# Altium PCB Sensor_Box_IO_Relay.PCBDOC (part 1 of 2)
Units mm, origin at the board's own origin, x right, y up, seen from the top; angles counter-clockwise.
Board outline 45.25 x 73.05 mm, 2 copper layers (Top, Bot), stack 1.571 mm thick; 73 components, 71 nets, 243 pads, 88 vias.
Unrouted connection lines stored in the file: 1.
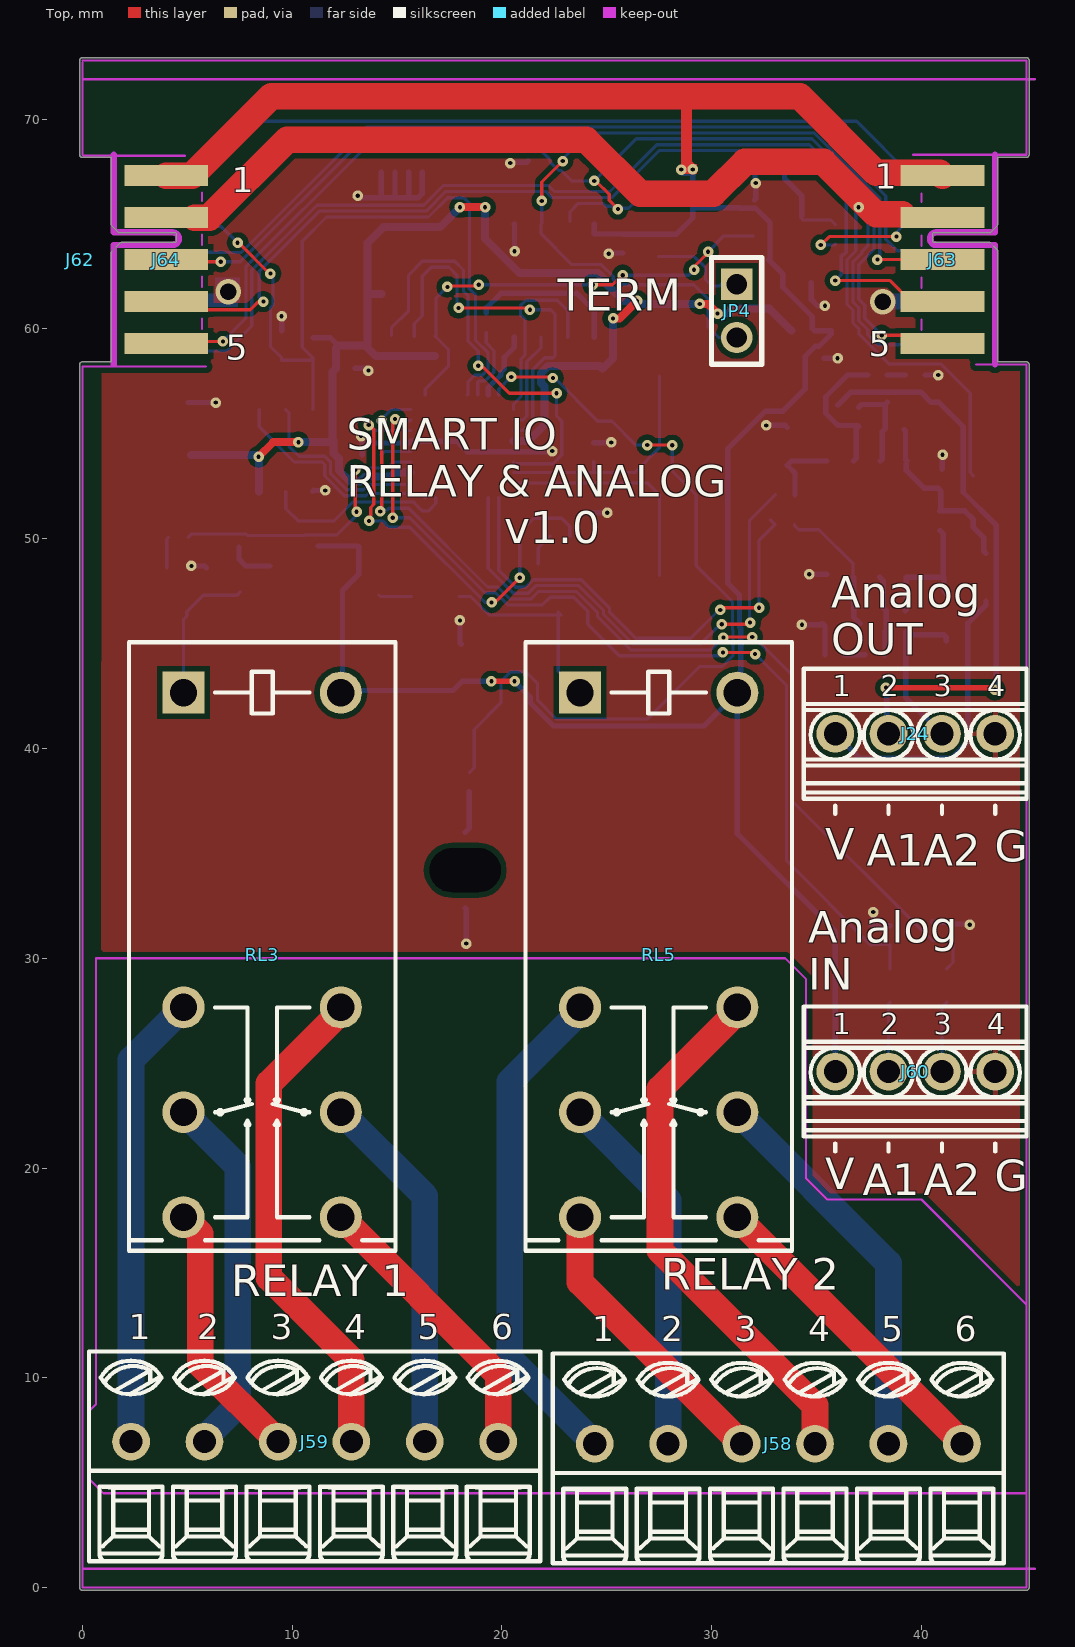
[diagram p0: Top view]
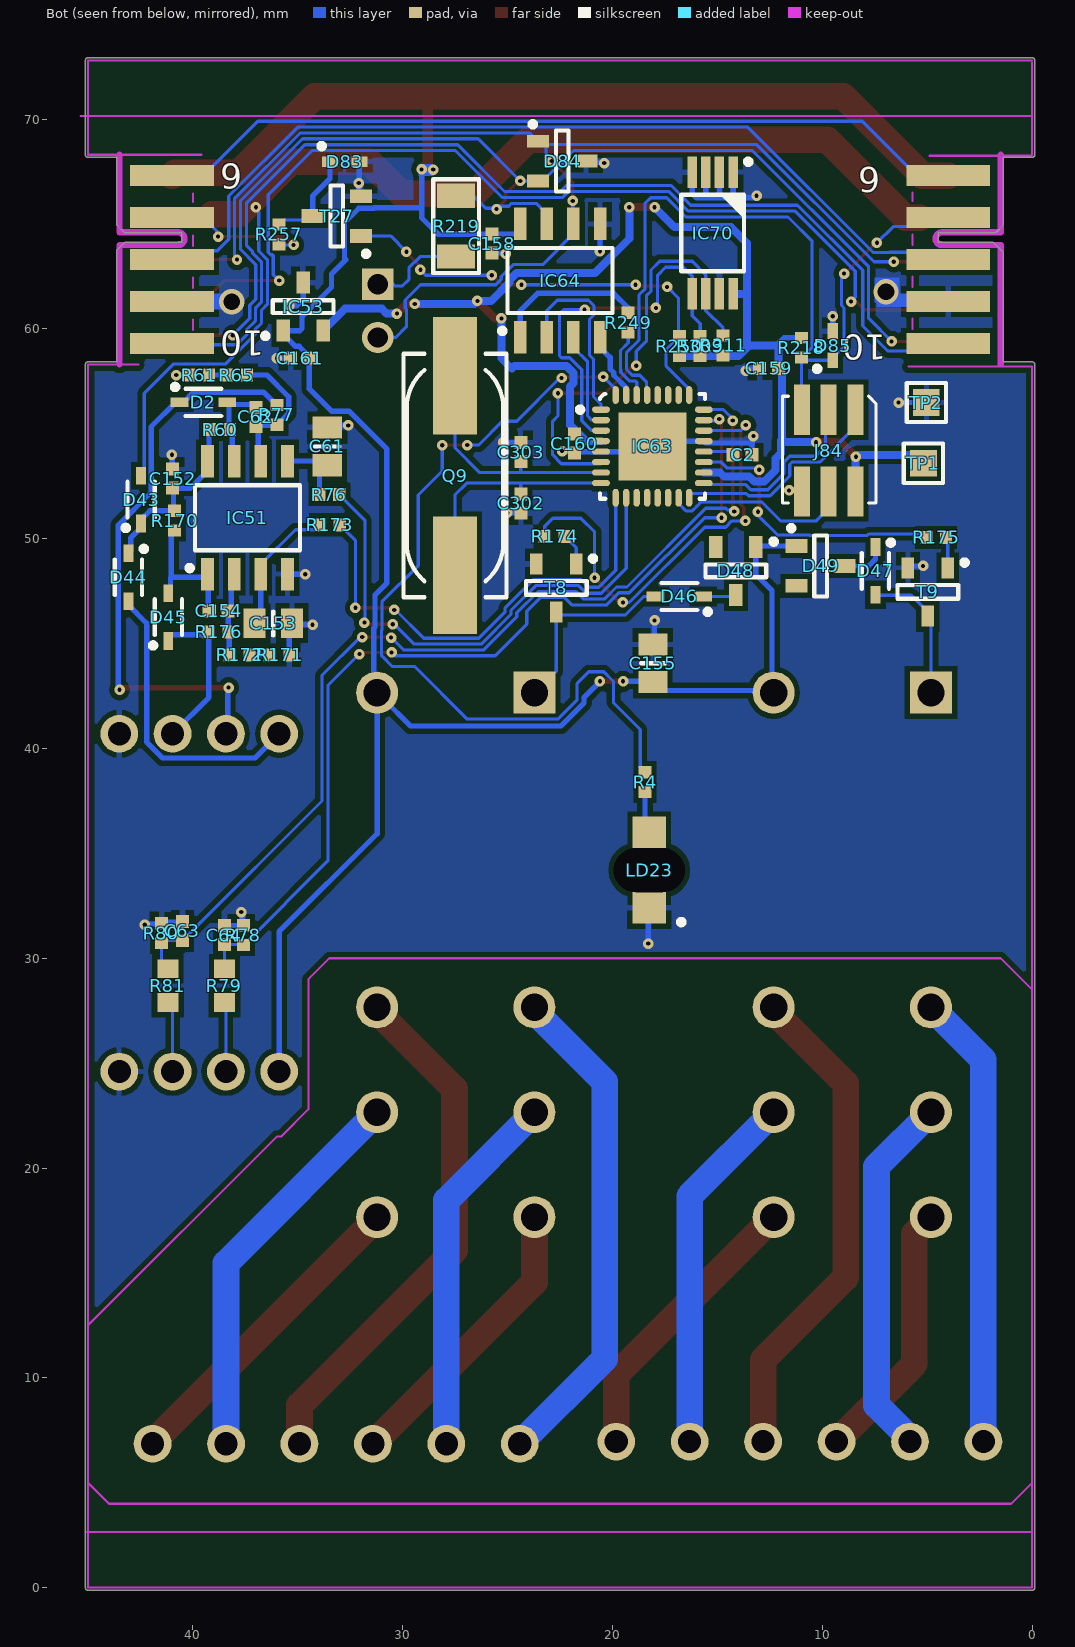
[diagram p1: Bot view, seen from below]
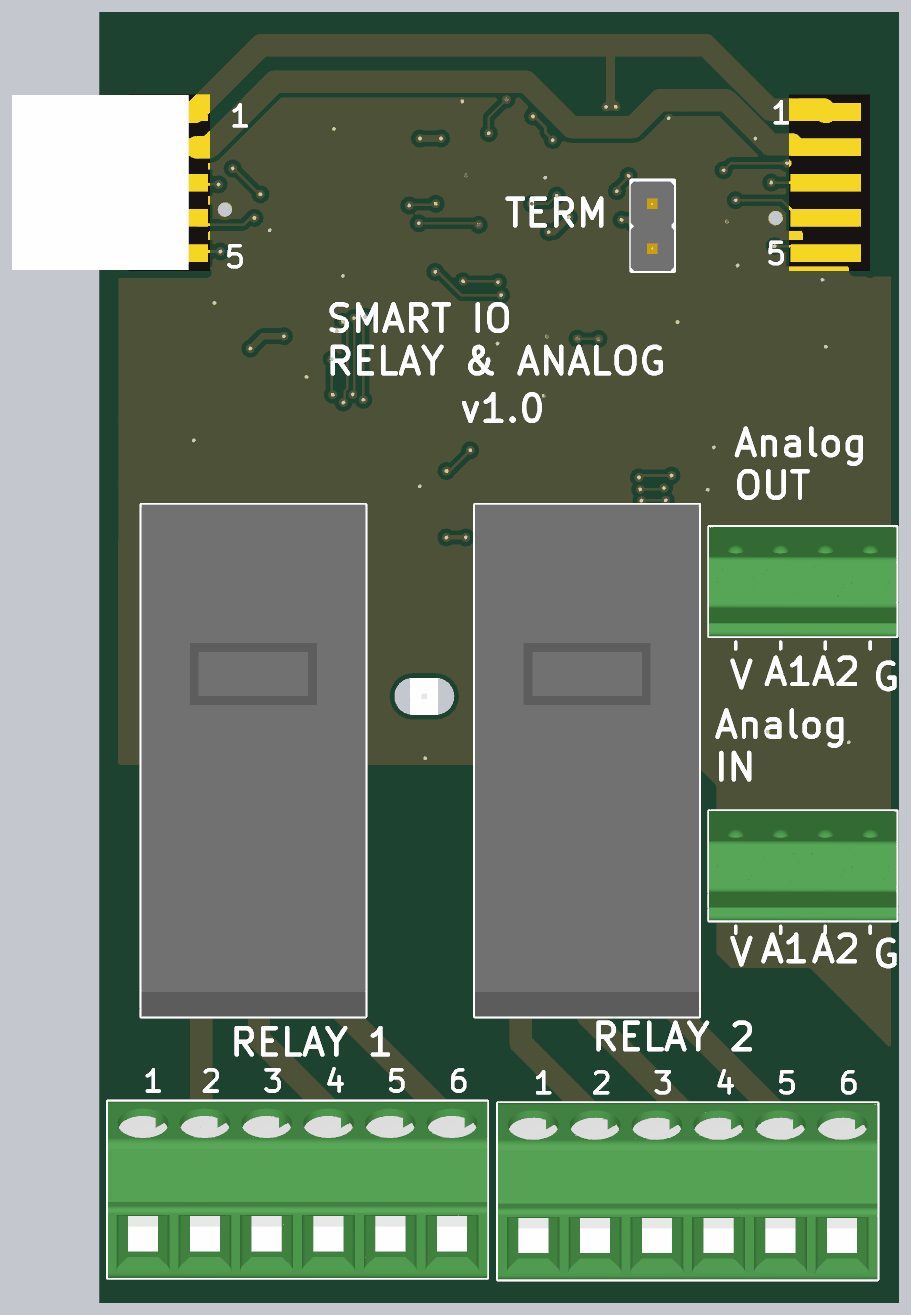
[diagram p2: 3D render of the assembled board from above, using the file's embedded part models]
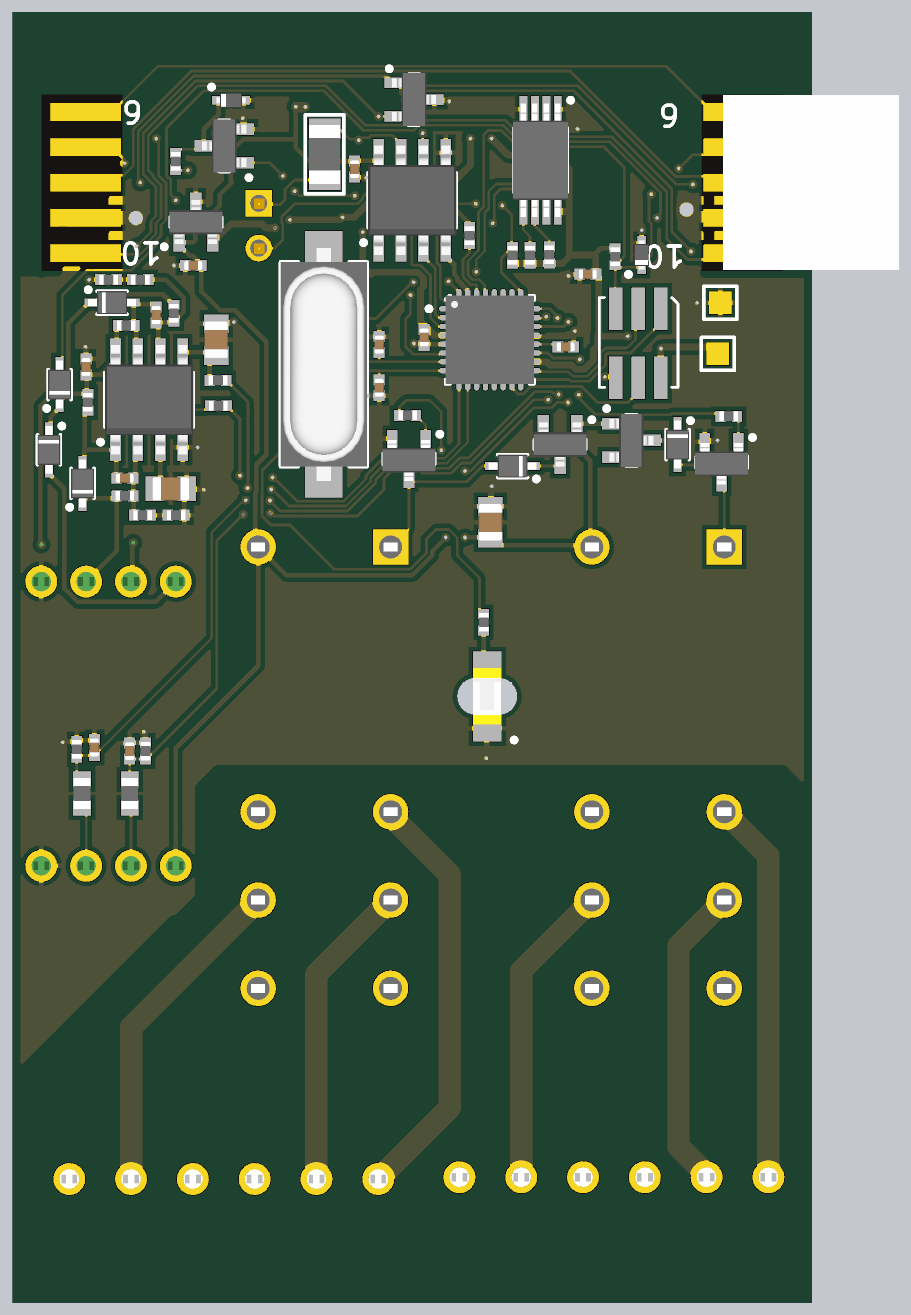
[diagram p3: 3D render of the assembled board from below, using the file's embedded part models]

## Layer stack, top to bottom
TopSolder: solder mask 0.0102, Solder Resist, Dk 3.5
Top: signal copper 0.0356
Dielectric1: core 1.5, FR-4, Dk 4.8
Bot: signal copper 0.0356
BottomSolder: solder mask 0.0102, Solder Resist, Dk 3.5

## Board outline
-0.127,58.3 cw(c0,58.3) 0,58.427 1.373,58.427 1.373,63.6 cw(c1.5,63.6) 1.41,63.69 1.81,64.09 1.809,64.09 cw(c1.9,64) 1.9,64.127 4.473,64.127 4.473,64.573 1.8,64.573 cw(c1.8,64.7) 1.709,64.61 1.71,64.61 1.41,64.91 1.41,64.909 cw(c1.5,65) 1.373,65 1.373,68.173 0,68.173 cw(c0,68.3) -0.127,68.3 -0.127,72.8 cw(c0,72.8) 0.002,72.927 45,72.927 cw(c45,72.8) 45.127,72.8 cw(c45,72.8) 45.127,72.798 45.127,68.3 cw(c45,68.3) 45,68.173 43.627,68.173 43.627,65 cw(c43.5,65) 43.59,64.909 43.59,64.91 43.29,64.61 43.291,64.61 cw(c43.2,64.7) 43.2,64.573 40.527,64.573 40.527,64.127 43.2,64.127 cw(c43.2,64) 43.291,64.09 43.29,64.09 43.59,63.79 cw(c43.5,63.7) 43.627,63.7 43.627,58.427 45,58.427 cw(c45,58.3) 45.09,58.39 cw(c45,58.3) 45.127,58.3 45.127,0 cw(c45,0) 45.096,-0.084 cw(c45,0) 45,-0.127 22.5,-0.127 cw(c22.5,0) 22.498,-0.127 0.001,-0.127 cw(c0,0) -0.127,0

## Design rules (kind name [scope] priority, off if disabled: settings)
Clearance Clearance_DIFF [(InDifferentialPairClass('All Differential Pairs'))] p1: gap=0.127 ignorepadtopadclearanceinfootprint=FALSE except(0: Arc-Hole Track-Hole SMDPad-Hole THPad-Hole Via-Hole Fill-Hole Poly-Hole Region-Hole Text-Hole; 0.254: Arc-Poly Track-Poly SMDPad-Poly THPad-Poly Via-Poly Fill-Poly Poly-Poly Poly-Region Poly-Text)
Clearance [All] p2: gap=0.127 ignorepadtopadclearanceinfootprint=FALSE except(0: Arc-Hole Track-Hole SMDPad-Hole THPad-Hole Via-Hole Fill-Hole Poly-Hole Region-Hole Text-Hole; 0.254: Arc-Poly Track-Poly SMDPad-Poly THPad-Poly Via-Poly Fill-Poly Poly-Poly)
DiffPairsRouting [All] p1: maxlimit=0.254 minlimit=0.127 mostfreqgap=0.127 toplayer_minwidth=0.127 toplayer_maxwidth=0.381 toplayer_prefwidth=0.254 bottomlayer_minwidth=0.127 bottomlayer_maxwidth=0.381 bottomlayer_prefwidth=0.254 maxuncoupledlength=12.7
FabricationTestPointUsage TestPointUsage [All] p1: valid=0 allowmultiple=FALSE
FabricationTestpoint Testpoint [All] p1: side=3 testpointundercomponent=TRUE minsize=1.016 maxsize=2.54 preferedsize=1.524 minholesize=0.508 maxholesize=1.016 preferedholesize=0.813 testpointgrid=0.025 allowsidetop=TRUE allowsidebottom=TRUE usegrid=TRUE gridtolerance=0
HoleSize [All] p1: absolutevalues=TRUE maxlimit=3.81 minlimit=0.025 maxpercent=80.000 minpercent=20.000
HoleToHoleClearance [All] p1: gap=0.025 allowstackedmicrovias=TRUE
MinimumSolderMaskSliver [All] p1: minsoldermaskwidth=0
PlaneClearance [All] p1: clearance=0.254
PlaneConnect [All] p1: planeconnectstyle=Direct reliefexpansion=0.508 reliefentries=4 reliefconductorwidth=0.254 reliefairgap=0.254
PolygonConnect PolygonConnect_pad [(InPadClass('All Pads'))] p1: connectstyle=Relief reliefconductorwidth=0.254 reliefentries=4 polygonreliefangle="90 Angle" airgapwidth=0.254
PolygonConnect [All] p2: connectstyle=Direct reliefconductorwidth=0.254 reliefentries=4 polygonreliefangle="45 Angle" airgapwidth=0.254
RoomDefinition Sensor_Box_IO_Relay [InComponentClass('Sensor_Box_IO_Relay')] p1 off: confinementstyle=ConfineIn formatcopy=TRUE lockcomponents=FALSE outline -10.578,28.41 172.172,28.41 172.172,52.16 -10.578,52.16
RoutingVias [All] p1: holewidth=0.2 width=0.5 viastyle="Through Hole" minholewidth=0.2 minwidth=0.5 maxholewidth=1 maxwidth=2
SilkToSilkClearance [All] p1: silktosilkclearance=0
SilkToSolderMaskClearance SilkscreenOverComponentPads [IsPad] p1: minsilkscreentomaskgap=0 clearancetoexposedcopper=TRUE
SolderMaskExpansion [All] p1: expansion=0.051
Width [All] p1: maxlimit=1.27 minlimit=0.127 preferedwidth=0.127
20 further rules are at their usual default settings.

## Components (designator, comment, footprint, x,y, rotation, side; value= is the part's Value field where it differs from the comment)
C2 "1uF" CAPC1005X55N 13.8,54 r180 bottom
C61 "10uF" CAPC2012X135N 33.6,54.4 r90 bottom
C62 "18pF" CAPC1005X55N 37,55.8 r270 bottom
C63 "100nF" CAPC1005X55N 40.5,31.3 r90 bottom
C64 "100nF" CAPC1005X55N 38.5,31.1 r90 bottom
C152 "1uF" CAPC1005X55N 40.973,52.861 r270 bottom
C153 "10uF" CAPC2012X135N 36.173,45.961 r180 bottom
C154 "18pF" CAPC1005X55N 38.773,46.561 r180 bottom
C155 "10uF" CAPC2012X135N 18.073,44.061 r90 bottom
C158 "1uF" CAPC1005X55N 25.756,64.067 r90 bottom
C159 "1uF" CAPC1005X55N 12.548,58.115 r180 bottom
C160 "100nF" CAPC1005X55N 21.819,54.534 r90 bottom
C161 "100nF" CAPC1005X55N 34.9,58.6 r0 bottom
C302 "18pF" CAPC1005X55N 24.373,51.681 r90 bottom
C303 "18pF" CAPC1005X55N 24.373,54.127 r270 bottom
D2 "1N4148WS" SODFL2512X100N 39.5,56.5 r180 bottom
D43 "1N4148WS" SODFL2512X100N 42.473,51.861 r90 bottom
D44 "1N4148WS" SODFL2512X100N 43.073,48.161 r270 bottom
D45 "1N4148WS" SODFL2512X100N 41.173,46.261 r90 bottom
D46 "1N4148WS" SODFL2512X100N 16.815,47.244 r0 bottom
D47 "1N4148WS" SODFL2512X100N 7.468,48.463 r270 bottom
D48 "BZX84C15" SOT95P240X130-3N 14.122,48.463 r270 bottom
D49 "BZX84C15" SOT95P240X130-3N 10.084,48.7 r180 bottom
D83 "PESD3V3S1UB" SODFL1608X65N 32.766,67.962 r180 bottom
D84 "SM712" SOT95P237X112-3N 22.4,68 r180 bottom
D85 "PESD3V3S1UB" SODFL1608X65N 9.5,59.2 r90 bottom
IC51 "LM358AD" SOIC127P600X175-8N 37.4,51 r90 bottom
IC53 "AP7313-33SAG-7" SOT95P240X130-3N 34.747,61.062 r90 bottom
IC63 "ATMEGA328PB-MU" QFN50P500X500X100-33N-S325 18.1,54.4 r180 bottom
IC64 "ST485ECDR" SOIC127P600X175-8N 22.5,62.3 r90 bottom
IC70 "M24256-BRDW6" SOP65P640X120-8N 15.229,64.567 r270 bottom
J24 "=Family" PHOENIX_1725672 39.7,40.7 r0 top
J58 "=Family" PHOENIX_1751138 33.173,6.861 r0 top
J59 "=Family" PHOENIX_1751138 11.073,6.961 r0 top
J60 "=Family" PHOENIX_1725672 39.7,24.6 r0 top
J62 "=Family" "AVX_00 9159 010 061 916" -0.1,63.3 r180 top
J63 "=Family" EDGE10T5B10_P200W1000L0F100X400 41,59.3 r90 top
J64 "=Family" EDGE10T1B6_P200W1000L0F100X400 4,67.3 r270 top
J84 "ZL322-2X3P or PLHTD6S-TR-CV" ZL322-2X3P 9.7,54.2 r0 bottom
JP4 "1798942 (goldpin 2x 2.54)" jump 31.191,62.128 r0 top
LD23 "Green" LED_KINGBRIGHT_KPTR3216 18.25,34.2 r270 bottom
Q9 "8.192MHz" XTAL_ABRACON_ABLS 27.508,53.01 r90 bottom
R4 "10k" RESC1005X40N 18.45,38.4 r270 bottom
R60 "10k" RESC1005X40N 38.7,55.2 r180 bottom
R61 "10k" RESC1005X40N 39.7,57.8 r0 bottom
R65 "10k" RESC1005X40N 37.9,57.8 r0 bottom
R76 "10k" RESC1005X40N 33.5,52.1 r180 bottom
R77 "10k" RESC1005X40N 36,55.9 r270 bottom
R78 "1k" RESC1005X40N 37.6,31.1 r270 bottom
R79 "9k1" RESC1608X55N 38.5,28.7 r270 bottom
R80 "1k" RESC1005X40N 41.5,31.2 r270 bottom
R81 "9k1" RESC1608X55N 41.2,28.7 r270 bottom
R170 "10k" RESC1005X40N 40.873,50.861 r270 bottom
R171 "10k" RESC1005X40N 35.873,44.461 r180 bottom
R172 "10k" RESC1005X40N 37.773,44.461 r180 bottom
R173 "10k" RESC1005X40N 33.473,50.661 r180 bottom
R174 "1k" RESC1005X40N 22.758,50.114 r180 bottom
R175 "1k" RESC1005X40N 4.573,50.061 r180 bottom
R176 "10k" RESC1005X40N 38.773,45.561 r180 bottom
R218 "10k" RESC1005X40N 11,59.1 r270 bottom
R219 "120R" 1206R 27.457,64.897 r270 bottom
R249 "1k" RESC1005X40N 19.253,60.298 r90 bottom
R250 "100k" RESC1005X40N 16.815,59.182 r270 bottom
R257 "49R9" RESC1005X40N 35.9,64.5 r90 bottom
R309 "10k" RESC1005X40N 15.824,59.182 r90 bottom
R311 "10k" RESC1005X40N 14.732,59.207 r90 bottom
RL3 "5VDC" REL_OMRON_G2RL-2-5DC 8.573,30.561 r270 top
RL5 "5VDC" REL_OMRON_G2RL-2-5DC 27.473,30.561 r270 top
T8 "BC817-25" SOT95P230X110-3N 22.682,47.65 r270 bottom
T9 "BC817-25" SOT95P230X110-3N 4.973,47.461 r270 bottom
T27 "BSS138LT1G" SOT95P240X110-3N 33.147,65.38 r0 bottom
TP1 "Test Point" TPS127 5.182,53.594 r90 bottom
TP2 "Test Point" TPS127 5.043,56.49 r90 bottom

## Footprints (in the part's own frame and the unit in brackets; to place one, negate y for a bottom-side part, rotate by r counter-clockwise, add the part's x,y. Pads: shape width x height; smd on the part's side, far side on the other; paste and mask are expansions set on the pad)
1206R [mm]
  rect 1.15x1.8 smd: 1(-1.45,0) 2(1.45,0)
  silkscreen extent -2.24,-1.09 2.24,1.09, body extent -1.67,-0.87 1.68,0.88, height 0.65
"AVX_00 9159 010 061 916" [mm] "10 Contacts, 2mm Pitch, Open Ended Card Edge Connector, 9159 Series"
  body extent -5,-4.95 5,4.95, height 1.7
CAPC1005X55N [mm] "Chip Capacitor, Body 1.0x0.55mm, IPC Medium Density"
  rect 0.62x0.62 smd: 1(-0.45,0) 2(0.45,0)
  body extent -0.52,-0.27 0.53,0.28, height 0.55
CAPC2012X135N [mm] "Chip Capacitor, Body 2.0x1.25mm, IPC Medium Density"
  rect 1.05x1.4 smd: 1(-0.9,0) 2(0.9,0)
  silkscreen extent 0,-0.58 0,0.58, body extent -1.05,-0.67 1.05,0.68, height 1.25
EDGE10T1B6_P200W1000L0F100X400 [mm] "10 contacts Board Edge Connector, First Left Top Pad 1, First Left Bottom Pad 2, Pitch 2mm, Length 0mm, Width 10mm, Finger Lenght 4mm, Finger Width 1mm"
  rect 1x4 smd paste-0.5: 1(0,0) 2(2,0) 3(4,0) 4(6,0) 5(8,0)
  rect 1x4 smd far side paste-0.5: 6(0,0) 7(2,0) 8(4,0) 9(6,0) 10(8,0)
  KeepOutLayer lines w0.3: 9,-2.5 3.3,-2.5 3.3,0.3 ccw(c3,0.3) 2.7,0.3 2.7,-2.5 -1,-2.5
EDGE10T5B10_P200W1000L0F100X400 [mm] "10 contacts Board Edge Connector, First Left Top Pad 5, First Left Bottom Pad 10, Pitch 2mm, Length 0mm, Width 10mm, Finger Lenght 4mm, Finger Width 1mm"
  rect 1x4 smd paste-0.5: 1(8,0) 2(6,0) 3(4,0) 4(2,0) 5(0,0)
  rect 1x4 smd far side paste-0.5: 6(8,0) 7(6,0) 8(4,0) 9(2,0) 10(0,0)
  KeepOutLayer lines w0.3: -1,-2.5 4.7,-2.5 4.7,0.3 cw(c5,0.3) 5.3,0.3 5.3,-2.5 9,-2.5
jump [mm]
  rect 1.5x1.5 hole 0.965: 1(0,0)
  round 1.5 hole 0.965: 2(0,-2.54)
  silkscreen extent -1.2,-3.81 1.2,1.27, body extent -1.26,-3.84 1.19,1.24, height 8
LED_KINGBRIGHT_KPTR3216 [mm] "Reverse Mount LED 3216, Hole 2.1x2.3mm 0.35mm Height"
  rect 1.5x1.6 smd: 1(1.8,0) 2(-1.8,0)
  oval 1.9x3.2 hole 2.1 slot 3.4 at 90 deg unplated mask+0.1: 3(0,0)
  silkscreen extent 2.35,1.4 2.6,1.65, body extent -1.6,-0.8 1.6,0.8, height 0.25
PHOENIX_1725672 [mm] "Micro PCB Terminal Block, Pitch 2.54mm, 4 Positions, Screw Connection"
  round 1.8 hole 1.1: 1(-3.81,0) 2(-1.27,0) 3(1.27,0) 4(3.81,0)
  silkscreen extent -5.31,-3.81 5.31,3.1, body extent -5.31,-3.1 5.31,3.1, height 8.5
PHOENIX_1751138 [mm] "PC Terminal Block, Pitch 3.5mm, 6 Positions, Screw Connection"
  round 1.8 hole 1.1: 1(-8.75,0) 2(-5.25,0) 3(-1.75,0) 4(1.75,0) 5(5.25,0) 6(8.75,0)
  silkscreen extent -10.75,-5.7 10.75,4.3, body extent -10.75,-5.7 10.75,4.3, height 9.5
QFN50P500X500X100-33N-S325 [mm] "QFN, (MO-220-VHHD-4) 0.50mm pitch,square; 8 pin X 8 pin, 5mm X 5mm X 1.00mm H body (w/thermal tab 3.25 X 3.25mm),  IPC Medium Density"
  oval 0.85x0.3 smd: 1(-2.45,1.75) 2(-2.45,1.25) 3(-2.45,0.75) 4(-2.45,0.25) 5(-2.45,-0.25) 6(-2.45,-0.75) 7(-2.45,-1.25) 8(-2.45,-1.75) 17(2.45,-1.75) 18(2.45,-1.25) 19(2.45,-0.75) 20(2.45,-0.25) 21(2.45,0.25) 22(2.45,0.75) 23(2.45,1.25) 24(2.45,1.75)
  oval 0.3x0.85 smd: 9(-1.75,-2.45) 10(-1.25,-2.45) 11(-0.75,-2.45) 12(-0.25,-2.45) 13(0.25,-2.45) 14(0.75,-2.45) 15(1.25,-2.45) 16(1.75,-2.45) 25(1.75,2.45) 26(1.25,2.45) 27(0.75,2.45) 28(0.25,2.45) 29(-0.25,2.45) 30(-0.75,2.45) 31(-1.25,2.45) 32(-1.75,2.45)
  rect 3.25x3.25 smd: 33(0,0)
  silkscreen extent -3.58,-2.5 2.5,2.5, body extent -2.5,-2.5 2.5,2.5, height 1
REL_OMRON_G2RL-2-5DC [mm] "8 Leads, Row Spacing 7.5 mm; Body 29mm x 12.7mm, OMRON_G2RL Series"
  rect 2x2 hole 1.3: 1(-12.1,-3.75)
  round 2 hole 1.3: 2(2.9,-3.75) 3(7.9,-3.75) 4(12.9,-3.75) 5(12.9,3.75) 6(7.9,3.75) 7(2.9,3.75) 8(-12.1,3.75)
  silkscreen extent -14.5,-6.35 14.5,6.35, body extent -14.5,-6.35 14.5,6.35, height 15.7
RESC1005X40N [mm] "Chip Resistor, EIA 0402, Metric 1005, Body 1.0x0.5mm, IPC Medium Density"
  rect 0.58x0.62 smd: 1(-0.47,0) 2(0.47,0)
  body extent -0.52,-0.27 0.53,0.28, height 0.4
RESC1608X55N [mm] "Chip Resistor, EIA 0603, Metric 1608, Body 1.6x0.8mm, IPC Medium Density"
  rect 0.9x1 smd: 1(-0.8,0) 2(0.8,0)
  body extent -0.87,-0.47 0.88,0.48, height 0.55
SODFL1608X65N [mm] "Ultra Small Outline Diode Flat Lead (SOD-523), Body; 1.2mm L X 0.8mm W X 0.65mm H, IPC Medium Density"
  rect 0.75x0.5 smd: 1(-0.7,0) 2(0.7,0)
  silkscreen extent -1.23,0.63 -0.98,0.87, body extent -0.82,-0.42 0.83,0.43, height 0.65
SODFL2512X100N [mm] "SODFL Diode; 1.70mm W X 1.25mm L X 1.00mm H body, IPC Medium Density"
  rect 0.84x0.46 smd: 1(-1.14,0) 2(1.14,0)
  silkscreen extent -1.48,-0.65 0.85,0.85, body extent -1.35,-0.65 1.35,0.65, height 1
SOIC127P600X175-8N [mm] "SOIC 8, Pitch 1.27mm - Body 4x5mm, IPC Medium Density"
  rect 1.55x0.6 smd: 1(-2.7,1.905) 2(-2.7,0.635) 3(-2.7,-0.635) 4(-2.7,-1.905) 5(2.7,-1.905) 6(2.7,-0.635) 7(2.7,0.635) 8(2.7,1.905)
  silkscreen extent -2.52,-2.5 1.55,2.88, body extent -3.1,-2.5 3.1,2.5, height 1.75
SOP65P640X120-8N [mm] "SOP, 0.65mm pitch; 8 pin, 4.40mm W X 3.00mm L X 1.20mm H body, IPC Medium Density"
  rect 1.5x0.45 smd: 1(-2.9,0.975) 2(-2.9,0.325) 3(-2.9,-0.325) 4(-2.9,-0.975) 5(2.9,-0.975) 6(2.9,-0.325) 7(2.9,0.325) 8(2.9,0.975)
  silkscreen extent -3.52,-1.5 1.83,1.82, body extent -3.2,-1.55 3.2,1.55, height 1.2
SOT95P230X110-3N [mm] "SOT23, 3 pin, Pitch 0.95mm - 1.3mm W X 2.9mm L X 1.1mm H, IPC Medium Density"
  rect 1x0.6 smd: 1(-1.15,0.95) 2(-1.15,-0.95) 3(1.15,0)
  silkscreen extent -1.52,-1.45 0.33,1.87, body extent -1.08,-1.5 1.25,1.5, height 1.1
SOT95P237X112-3N [mm] "SOT, 0.95mm, pitch; 3 pin,1.30mm W X 2.92mm L X 1.12mm H body, IPC Medium Density"
  rect 1.05x0.6 smd: 1(-1.15,0.95) 2(-1.15,-0.95) 3(1.15,0)
  silkscreen extent -1.53,-1.45 0.3,1.87, body extent -1.25,-1.5 1.25,1.5, height 1.1
SOT95P240X110-3N [mm] "SOT23 3-Leads, Pitch 0.95mm, Body 1.3x2.9mm, IPC Medium Density"
  rect 1.05x0.65 smd: 1(-1.15,0.95) 2(-1.15,-0.95) 3(1.15,0)
  silkscreen extent -1.52,-1.45 0.3,1.92, body extent -1.25,-1.5 1.25,1.5, height 1.1
SOT95P240X130-3N [mm] "SOT23 3-Leads, Pitch 0.95mm - Body 1.3x2.9mm, IPC Medium Density"
  rect 1.05x0.65 smd: 1(-1.15,0.95) 2(-1.15,-0.95) 3(1.15,0)
  silkscreen extent -1.52,-1.45 0.3,1.92, body extent -1.25,-1.5 1.25,1.5, height 1.3
TPS127 [mm] "1.27 x  1.27mm SMD Test Point Area"
  rect 1.27x1.27 smd paste-1.27: 1(0,0)
  silkscreen extent -0.94,-0.94 0.94,0.94
XTAL_ABRACON_ABLS [mm] "HC/49US (AT49) SMD Cristal, Body 11.4x4.7mm, ABLS Serie"
  rect 5.6x2.1 smd: 1(-4.75,0) 2(4.75,0)
  silkscreen extent -5.8,-2.45 5.8,2.45, body extent -6.6,-2.45 6.6,2.45, height 4.2
ZL322-2X3P [mm] "SMT 1.27 mm dual goldpin"
  rect 0.76x2.4 smd: 1(-1.27,-1.95) 2(-1.27,1.95) 3(0,-1.95) 4(0,1.95) 5(1.27,-1.95) 6(1.27,1.95)
  silkscreen extent -2.25,-2.58 2.2,2.5, body extent -2.05,-2.15 2.03,2.15, height 4.5

## Part data
C2 C152 C158 C159: library part CC0402_1UF_16V_10%_X5R, "Non-polarised capacitor", Case=0402, Manufacturer=GENERIC, Manufacturer1 ComponentHeight=0.55mm, Manufacturer1 Example=TDK, Manufacturer1 Part Number=C1005X5R1C105KT, Tolerance=±10%, Voltage=16V, Author="CERN DEM JLC", Component Type=Standard, CreateDate=25.10.2012, HelpURL=\\cern.ch\dfs\Applications\Altium\Datasheets\CC0402_X5R_TDK_C.pdf, LatestRevisionDate=25.10.2012, Manufacturer Part Number=CC0402_1UF_16V_10%_X5R, Mounted=Yes, Part Description="SMD Multilayer Chip Ceramic Capacitor", Part Number=CC0402_1UF_16V_10%_X5R, Pin Count=2, Sense=No, SMD=Yes, Socket=No, Status=Preferred, TC=X5R
C61 C153 C155: library part CC0805_10UF_16V_10%_X5R, "Non-polarised capacitor", Case=0805, Manufacturer=GENERIC, Manufacturer1 ComponentHeight=1.4mm, Manufacturer1 Example=KEMET, Manufacturer1 Part Number=C0805C106K4PAC, Tolerance=±10%, Voltage=16V, Author="CERN DEM JLC", Component Type=Standard, CreateDate=03.12.2007, HelpURL=\\cern.ch\dfs\Applications\Altium\Datasheets\CC1206_X5R_KEMET.pdf, LatestRevisionDate=03.12.2007, Manufacturer Part Number=CC0805_10UF_16V_10%_X5R, Mounted=Yes, Part Description="SMD Multilayer Chip Ceramic Capacitor", Part Number=CC0805_10UF_16V_10%_X5R, Pin Count=2, Sense=No, SMD=Yes, Socket=No, Status=Preferred, TC=X5R
C62 C154 C302 C303: library part CC0402_18PF_50V_5%_C0G, "Non-polarised capacitor", Case=0402, Manufacturer=GENERIC, Manufacturer1 ComponentHeight=0.55mm, Manufacturer1 Example=KEMET, Manufacturer1 Part Number=C0402C180J5GACTU, Tolerance=±5%, Voltage=50V, Author="CERN DEM JLC", Component Type=Standard, CreateDate=04.10.2016, HelpURL="\\cern.ch\dfs\Applications\Altium\Datasheets\CC0805_C0G_KEMET_(Commercial Grade).pdf", LatestRevisionDate=04.10.2016, Manufacturer Part Number=CC0402_18PF_50V_5%_C0G, Mounted=Yes, Part Description="SMD Multilayer Chip Ceramic Capacitor", Part Number=CC0402_18PF_50V_5%_C0G, Pin Count=2, Sense=No, SMD=Yes, Socket=No, Status=Preferred, TC=C0G/NP0
C63 C64 C161: library part CC0402_100NF_16V_10%_X7R, "Non-polarised capacitor", Case=0402, Manufacturer=GENERIC, Manufacturer1 ComponentHeight=0.55mm, Manufacturer1 Example=MURATA, Manufacturer1 Part Number=GRM155R71C104KA88D, Tolerance=±10%, Voltage=16V, Author="CERN DEM JLC", Component Type=Standard, CreateDate=05.12.2013, HelpURL=\\cern.ch\dfs\Applications\Altium\Datasheets\CC0402_X7R_MURATA_GRM.pdf, LatestRevisionDate=03.12.2007, Manufacturer Part Number=CC0402_100NF_16V_10%_X7R, Mounted=Yes, Part Description="SMD Multilayer Chip Ceramic Capacitor", Part Number=CC0402_100NF_16V_10%_X7R, Pin Count=2, Sense=No, SMD=Yes, Socket=No, Status="Not Recommended", TC=X7R
C160: library part CC0402_100NF_16V_10%_X5R, "Non-polarised capacitor", Case=0402, Manufacturer=GENERIC, Manufacturer1 ComponentHeight=0.55mm, Manufacturer1 Example=MURATA, Manufacturer1 Part Number=GRM155R61C104KA88D, Tolerance=±10%, Voltage=16V, Author="CERN DEM JLC", Component Type=Standard, CreateDate=10.12.2013, HelpURL=\\cern.ch\dfs\Applications\Altium\Datasheets\CC0402_X5R_MURATA_GRM.pdf, LatestRevisionDate=10.12.2013, Manufacturer Part Number=CC0402_100NF_16V_10%_X5R, Mounted=Yes, Part Description="SMD Multilayer Chip Ceramic Capacitor", Part Number=CC0402_100NF_16V_10%_X5R, Pin Count=2, Sense=No, SMD=Yes, Socket=No, Status=None, TC=X5R
D2 D43 D44 D45 D46 D47: "Diode", Case=SOD-323F, Manufacturer="FAIRCHILD SEMICONDUCTOR", Power=150mA, Voltage=75V, Author="CERN DEM JLC", Bonding=No, ComponentHeight=1mm, Component Type=Standard, CreateDate=12.05.2011, Device=1N4148WS, HelpURL=\\cern.ch\dfs\Applications\Altium\Datasheets\1N4148WS.pdf, LatestRevisionDate=12.05.2011, Manufacturer Part Number=1N4148WS, Mounted=Yes, PackageDescription="SODFL Diode; 1.70mm W X 1.25mm L X 1.00mm H body, IPC Medium Density", Part Description="Small Signal Diodes", Part Number=1N4148WS, Pin Count=2, PressFit=No, Sense=No, SMD=Yes, Socket=No
D48 D49: "Diode Zener Anode Pin 1 Cathode Pin 3 (Pas de pin 2)", Case=SOT23-3, Manufacturer="FAIRCHILD SEMICONDUCTOR", Power=350mW, Voltage=15V, Author="CERN DEM JLC", Bonding=No, ComponentHeight=1.3mm, Component Type=Standard, CreateDate=30.11.2011, Device=BZX84C15, HelpURL=\\cern.ch\dfs\Applications\Altium\Datasheets\BZX84C15.pdf, LatestRevisionDate=30.11.2011, Manufacturer Part Number=BZX84C15, Mounted=Yes, PackageDescription="SOT23 3-Leads, Pitch 0.95mm - Body 1.3x2.9mm, IPC Medium Density", Part Description="Zener Diode", Part Number=BZX84C15, Pin Count=3, PressFit=No, Sense=No, SMD=Yes, Socket=No
D83 D85: "ESD protection diode", Case=SOD523, Manufacturer="NXP SEMICONDUCTORS", Power=330W, Voltage=3V3, Author="CERN DEM JLC", Bonding=No, ComponentHeight=0.65mm, Component Type=Standard, CreateDate=29.11.2012, Device=PESD3V3S1UB, HelpURL=\\cern.ch\dfs\Applications\Altium\Datasheets\PESD3V3S1UB.pdf, LatestRevisionDate=29.11.2012, Manufacturer Part Number=PESD3V3S1UB, Mounted=Yes, PackageDescription="Ultra Small Outline Diode Flat Lead (SOD-523), Body; 1.2mm L X 0.8mm W X 0.65mm H, IPC Medium Density", Part Description="ESD protection diode (23kV)", Part Number=PESD3V3S1UB, Pin Count=2, PressFit=No, Sense=No, SMD=Yes, Socket=No
D84: "Asymmetrical TVS Diode for Extended Common-Mode RS-485", Case=SOT-23, Manufacturer=SEMTECH, Power=400W, Voltage=12V/-7V, Author="CERN DEM JLC", Bonding=No, ComponentHeight=1.12mm, Component Type=Standard, CreateDate=23.04.2012, Device=SM712, HelpURL=\\cern.ch\dfs\Applications\Altium\Datasheets\SM712.pdf, LatestRevisionDate=23.04.2012, Manufacturer Part Number=SM712, Mounted=Yes, PackageDescription="SOT, 0.95mm, pitch; 3 pin,1.30mm W X 2.92mm L X 1.12mm H body, IPC Medium Density", Part Description="Asymmetrical TVS Diode for Extended Common-Mode RS-485", Part Number=SM712, Pin Count=3, PressFit=No, Sense=No, SMD=Yes, Socket=No, Status=Obsolete
IC51: "Dual Operational Amplifier", Case=SOIC8, Manufacturer="TEXAS INSTRUMENTS", Author="CERN DEM JLC", Bonding=No, ComponentHeight=1.75mm, Component Type=Standard, CreateDate=02.12.2008, Device=LM358AD, HelpURL=\\cern.ch\dfs\Applications\Altium\Datasheets\LM358AD.pdf, LatestRevisionDate=13.04.2010, Manufacturer Part Number=LM358AD, Mounted=Yes, PackageDescription="SOIC 8, Pitch 1.27mm - Body 4x5mm, IPC Medium Density", Part Description="Dual Operational Amplifier", Part Number=LM358AD, Pin Count=8, PressFit=No, Sense=No, SMD=Yes, Socket=No
IC53: "3-Terminal Regulator 1=IN 2=OUT 3=GND", Case=SOT23, Manufacturer="DIODES INCORPORATED", Author="CERN DEM JLC", Bonding=No, ComponentHeight=1.35mm, Component Type=Standard, CreateDate=20.03.2018, Device=AP7313-33SAG-7, HelpURL=\\cern.ch\dfs\Applications\Altium\Datasheets\AP7313-33SAG-7.pdf, LatestRevisionDate=20.03.2018, Manufacturer Part Number=AP7313-33SAG-7, Mounted=Yes, PackageDescription="SOT23 3-Leads, Pitch 0.95mm - Body 1.3x2.9mm, IPC Medium Density", Part Description="3.3V, 150mA Low Quiescent Current, Fast Transient Low Dropout Linear Regulator", Part Number=AP7313-33SAG-7, Pin Count=3, PressFit=No, Sense=No, SMD=Yes, Socket=No
IC63: "8-bit AVR 20MHz Microcontroller With 32K Bytes In-System  Programmable  Flash", Case=QFN32, Manufacturer=ATMEL, Author=GK, Bonding=No, ComponentHeight=1mm, Component Type=Standard, CreateDate=2011-02-08, Device=ATMEGA328PB-MU, HelpURL=\\cern.ch\dfs\Applications\Altium\Datasheets\ATMEGA328P-MU.pdf, LatestRevisionDate=2014-07-02, Manufacturer Part Number=ATMEGA328PB-MU, Mounted=Yes, PackageDescription="QFN, (MO-220-VHHD-2) 0.50mm pitch,square; 8 pin X 8 pin, 5mm X 5mm X 1.00mm H body (w/thermal tab 3.25 X 3.25mm),  IPC Medium Density", Part Description="8-bit AVR Microcontroller, 32KB Flash, 1KB EEPROM, 2KB SRAM, 32-pin MLF, Industrial Grade (-40°C to 85°C)", Part Number=ATMEGA328PB-MU, Pin Count=33, PressFit=No, Sense=No, SMD=Yes, Socket=No
IC64: "±15kV ESD-Protected, Low Power  RS-485/RS-422 Transceiver", Case=SOIC8, Manufacturer="ST MICROELECTRONICS", Author="CERN DEM MR", Bonding=No, ComponentHeight=1.75mm, Component Type=Standard, CreateDate=15.02.2018, Device=ST485ECDR, HelpURL=\\cern.ch\dfs\Applications\Altium\Datasheets\ST485ECDR.pdf, LatestRevisionDate=15.02.2018, Manufacturer Part Number=ST485ECDR, Mounted=Yes, PackageDescription="SOIC 8, Pitch 1.27mm - Body 4x5mm, IPC Medium Density", Part Description="±15kV ESD-Protected, Low Power  RS-485/RS-422 Transceiver", Part Number=ST485ECDR, Pin Count=8, PressFit=No, Sense=No, SMD=Yes, Socket=No
IC70: "256-Kbit Serial I²C Bus EEPROM", Case=TSSOP8, Manufacturer="ST MICROELECTRONICS", Part Number=M24256-BRDW6P, Author="CERN DEM MR", Bonding=No, ComponentHeight=1.2mm, Component Type=Standard, CreateDate=17.03.2016, Device=M24256-BRDW6, HelpURL=\\cern.ch\dfs\Applications\Altium\Datasheets\M24256-BRDW6P.pdf, LatestRevisionDate=17.03.2016, Manufacturer Part Number=M24256-BRDW6, Mounted=Yes, PackageDescription="SOP, 0.65mm pitch; 8 pin, 4.40mm W X 3.00mm L X 1.20mm H body, IPC Medium Density", Part Description="256-Kbit Serial I²C Bus EEPROM", Pin Count=8, PressFit=No, Sense=No, SMD=Yes, Socket=No
J24 J60: library part PHOENIX_1725672, "Terminal Block, 4 Positions, Screw Connection", Manufacturer="PHOENIX CONTACT", Manufacturer Part Number="1725672 (MPT 0,5/4-2,54)", Author="CERN DEM JMW", ComponentHeight=8.5mm, Component Type=Standard, CreateDate=07.11.2008, HelpURL=\\cern.ch\dfs\Applications\Altium\Datasheets\PHOENIX_1725672.pdf, LatestRevisionDate=26.04.2010, Mounted=Yes, Part Description="6A, 63V, Terminal Block, Pitch 2.54mm, 4 Positions, Screw Connection", Part Number=PHOENIX_1725672, Pin Count=4, PressFit=No, Sense=No, SMD=No, Socket=No, Status=None
J58 J59: library part PHOENIX_1751138, "Terminal Block, 6 Positions, Screw Connection", Manufacturer="PHOENIX CONTACT", Manufacturer Part Number="1751138 (SMKDS 1/ 6-3,5)", Author="CERN DEM JLC", ComponentHeight=9.5mm, Component Type=Standard, CreateDate=31.03.2015, HelpURL=\\cern.ch\dfs\Applications\Altium\Datasheets\PHOENIX_1751138.pdf, LatestRevisionDate=31.03.2015, Mounted=Yes, Part Description="10A 200V PCB Terminal Block, Pitch 3.5mm, 6 Positions, Screw Connection (Conductor/PCB connection direction: 55°)", Part Number=PHOENIX_1751138, Pin Count=6, PressFit=No, Sense=No, SMD=No, Socket=No, Status=None
J62: library part "AVX_00 9159 010 061 916", "Open Ended Card Edge Connector, 9159 Series", Manufacturer=AVX, Manufacturer Part Number="00 9159 010 061 916", Author="CERN DEM MR", ComponentHeight=1.6mm, Component Type=Standard, CreateDate=13.02.2018, HelpURL="\\cern.ch\dfs\Applications\Altium\Datasheets\AVX_00 9159 010 061 916.pdf", LatestRevisionDate=13.02.2018, Mounted=Yes, Part Description="10 Contacts, 2mm Pitch, Open Ended Card Edge Connector, 9159 Series", Part Number="AVX_00 9159 010 061 916", Pin Count=10, PressFit=No, Sense=No, SMD=No, Socket=No, Status=None
J63: library part EDGE10T5B10_P200W1000L0F100X400, "PCB Edge Connector 10 (2x5)", Author="CERN DEM MR", ComponentHeight=0mm, Component Type="Standard (No BOM)", CreateDate=14.02.2018, HelpURL=\\cern.ch\dfs\Applications\Altium\Datasheets\EDGE10T5B10_P200W1000L0F100X400.pdf, LatestRevisionDate=14.02.2018, Mounted=No, Part Description="10 Contacts Board Edge Connector, Pitch 2mm, Length 0mm, Width 10mm, Finger Lenght 4mm, Finger Width 1mm", Part Number=EDGE10T5B10_P200W1000L0F100X400, Pin Count=10, PressFit=No, Sense=No, SMD=No, Socket=No, Status=None
J64: library part EDGE10T1B6_P200W1000L0F100X400, "PCB Edge Connector 10 (2x5)", Author="CERN DEM MR", ComponentHeight=0mm, Component Type="Standard (No BOM)", CreateDate=14.02.2018, HelpURL=\\cern.ch\dfs\Applications\Altium\Datasheets\EDGE10T1B6_P200W1000L0F100X400.pdf, LatestRevisionDate=14.02.2018, Mounted=No, Part Description="10 Contacts Board Edge Connector, Pitch 2mm, Length 0mm, Width 10mm, Finger Lenght 4mm, Finger Width 1mm", Part Number=EDGE10T1B6_P200W1000L0F100X400, Pin Count=10, PressFit=No, Sense=No, SMD=No, Socket=No, Status=None
J84: library part "CON_2x3 1.27 SMT Male", "1.27 mm dual row goldpin (Maritex)"
JP4: library part JUMPER, "Jumper", Supplier Part Number 1=1798942, Supplier 1=Farnell
LD23: library part LED_KINGBRIGHT_KPTR-3216CGCK, "LED Green 1A 2C", Manufacturer=KINGBRIGHT, Manufacturer Part Number=KPTR-3216CGCK, Author="CERN DEM MR", Bonding=No, Color=Green, ComponentHeight=0.35mm, Component Type=Standard, CreateDate=15.02.2016, HelpURL=\\cern.ch\dfs\Applications\Altium\Datasheets\LED_KINGBRIGHT_KPTR-3216CGCK.pdf, LatestRevisionDate=15.02.2016, Mounted=Yes, PackageDescription="Reverse Mount LED 3216, Hole 2.1x2.3mm 0.35mm Height", Part Description="Reverse Mount LED 1.4x1.6mm Green", Part Number=LED_KINGBRIGHT_KPTR-3216CGCK, Pin Count=2, PressFit=No, Sense=No, SMD=Yes, Socket=No
Q9: library part XTAL_8.192MHZ_ABRACON_ABLS-8.192MHZ-B2-T, "Quartz Crystal", Manufacturer=ABRACON, Manufacturer Part Number=ABLS-8.192MHZ-B2-T, Author="CERN DEM MR", Bonding=No, ComponentHeight=4.2mm, Component Type=Standard, CreateDate=15.02.2018, HelpURL=\\cern.ch\dfs\Applications\Altium\Datasheets\XTAL_ABRACON_ABLS.pdf, LatestRevisionDate=15.02.2018, Mounted=Yes, PackageDescription="SMD Crystal, Body 11.40mm L X 4.70mm W X 4.20mm H, HC/49US (AT49) ALBS Series", Part Description="Tolerance: ± 20ppm, Stability: ± 50ppm, -20°C to +70°C, 18pF, 80 Ohms ESR, Low Profile Surface Mount Microprocessor Crystal, ABLS Series", Part Number=XTAL_8.192MHZ_ABRACON_ABLS-8.192MHZ-B2-T, Pin Count=2, PressFit=No, Sense=No, SMD=Yes, Socket=No
R4 R60 R61 R65 R76 R77 R170 R171 R172 R173 R176 R218 R309 R311: library part R0402_10K_1%_0.0625W_100PPM, "Resistor - 1%", Case=0402, Manufacturer=GENERIC, Manufacturer1 ComponentHeight=0.4mm, Manufacturer1 Example="YAGEO PHYCOMP", Manufacturer1 Part Number=232270671003L, Power=0.0625W, Tolerance=±1%, Author="CERN DEM JLC", Component Type=Standard, HelpURL=\\cern.ch\dfs\Applications\Altium\Datasheets\R0402_Phycomp_RC0402.pdf, Manufacturer Part Number=R0402_10K_1%_0.0625W_100PPM, Mounted=Yes, Part Description="General Purpose Thick Film Chip Resistor", Part Number=R0402_10K_1%_0.0625W_100PPM, Pin Count=2, SMD=Yes, Socket=No, TC=±100ppm/°C
  R4 R218 R309 R311: CreateDate=03.12.2007, LatestRevisionDate=17.10.2012, PressFit=No, Sense=No, Status="Not Recommended"
  R60 R61 R65 R76 R77 R170 R171 R172 R173 R176: CreateDate=2007-12-03, LatestRevisionDate=2012-10-17, Status="Not recommended", Table="Resistors SMD"
R78 R80 R174 R175 R249: library part R0402_1K_1%_0.0625W_100PPM, "Resistor - 1%", Case=0402, Manufacturer=GENERIC, Manufacturer1 ComponentHeight=0.4mm, Manufacturer1 Example="YAGEO PHYCOMP", Manufacturer1 Part Number=232270671002L, Power=0.0625W, Tolerance=±1%, Author="CERN DEM JLC", Component Type=Standard, CreateDate=03.12.2007, HelpURL=\\cern.ch\dfs\Applications\Altium\Datasheets\R0402_Phycomp_RC0402.pdf, LatestRevisionDate=17.10.2012, Manufacturer Part Number=R0402_1K_1%_0.0625W_100PPM, Mounted=Yes, Part Description="General Purpose Thick Film Chip Resistor", Part Number=R0402_1K_1%_0.0625W_100PPM, Pin Count=2, PressFit=No, Sense=No, SMD=Yes, Socket=No, Status="Not Recommended", TC=±100ppm/°C
R79 R81: library part R0603_9K1_1%_0.1W_100PPM, "Resistor - 1%", Case=0603, Manufacturer=GENERIC, Manufacturer1 ComponentHeight=0.55mm, Manufacturer1 Example="NIC COMPONENT", Manufacturer1 Part Number=NRC06F9101TRF, Power=0.1W, Tolerance=±1%, Author="CERN DEM JLC", Component Type=Standard, CreateDate=03.12.2007, HelpURL=\\cern.ch\dfs\Applications\Altium\Datasheets\R0603_NIC_NRC.pdf, LatestRevisionDate=13.03.2008, Manufacturer Part Number=R0603_9K1_1%_0.1W_100PPM, Mounted=Yes, Part Description="General Purpose Thick Film Chip Resistor", Part Number=R0603_9K1_1%_0.1W_100PPM, Pin Count=2, PressFit=No, Sense=No, SMD=Yes, Socket=No, Status=Preferred, TC=±100ppm/°C
R219: library part RES_1206, "SMD Resistor", Supplier Part Number 1=39K0871, Supplier 1=Newark
R250: library part R0402_100K_1%_0.0625W_100PPM, "Resistor - 1%", Case=0402, Manufacturer=GENERIC, Manufacturer1 ComponentHeight=0.4mm, Manufacturer1 Example="YAGEO PHYCOMP", Manufacturer1 Part Number=232270671004L, Power=0.0625W, Tolerance=±1%, Author="CERN DEM JLC", Component Type=Standard, CreateDate=03.12.2007, HelpURL=\\cern.ch\dfs\Applications\Altium\Datasheets\R0402_Phycomp_RC0402.pdf, LatestRevisionDate=17.10.2012, Manufacturer Part Number=R0402_100K_1%_0.0625W_100PPM, Mounted=Yes, Part Description="General Purpose Thick Film Chip Resistor", Part Number=R0402_100K_1%_0.0625W_100PPM, Pin Count=2, PressFit=No, Sense=No, SMD=Yes, Socket=No, Status="Not Recommended", TC=±100ppm/°C
R257: library part R0402_49R9_1%_0.0625W_100PPM, "Resistor - 1%", Case=0402, Manufacturer=GENERIC, Manufacturer1 ComponentHeight=0.4mm, Manufacturer1 Example="YAGEO PHYCOMP", Manufacturer1 Part Number="232270674999L or RC0402FR-0749R9L", Power=0.0625W, Tolerance=±1%, Author="CERN DEM JLC", Component Type=Standard, CreateDate=2012-10-24, HelpURL=\\cern.ch\dfs\Applications\Altium\Datasheets\R0402_Phycomp_RC0402.pdf, LatestRevisionDate=2012-10-24, Manufacturer Part Number=R0402_49R9_1%_0.0625W_100PPM, Mounted=Yes, Part Description="General Purpose Thick Film Chip Resistor", Part Number=R0402_49R9_1%_0.0625W_100PPM, Pin Count=2, SMD=Yes, Socket=No, Status="Not recommended", Table="Resistors SMD", TC=±100ppm/°C
RL3 RL5: "DPDT Power Relay, G2RL Series", Manufacturer="OMRON ELECTRONIC", Manufacturer Part Number=G2RL-2-5DC, Part Number=REL_OMRON_G2RL-2-5DC, Author=GK, ComponentHeight=15.7mm, Component Type=Standard, CreateDate=16.06.2015, HelpURL=\\cern.ch\dfs\Applications\Altium\Datasheets\REL_OMRON_G2RL-24.pdf, LatestRevisionDate=16.06.2015, Mounted=Yes, PackageDescription="8 Leads, Row Spacing 7.5mm; Body 29mm x 12.7mm, OMRON_G2RL Series", Part Description="DPDT Power Relay, G2RL Series", Pin Count=8, PressFit=No, Sense=No, SMD=No, Socket=No, Status=None
T8 T9: "NPN Transistor", Case=SOT23-3, Manufacturer="NXP SEMICONDUCTORS", Author="CERN DEM JLC", Bonding=No, ComponentHeight=1.1mm, Component Type=Standard, CreateDate=28.10.2014, Device=BC817-25, HelpURL=\\cern.ch\dfs\Applications\Altium\Datasheets\BC817-25.pdf, LatestRevisionDate=28.10.2014, Manufacturer Part Number=BC817-25, Mounted=Yes, PackageDescription="SOT23, 3 pin, Pitch 0.95mm - 1.3mm W X 2.9mm L X 1.1mm H, IPC Medium Density", Part Description="45V 500mA NPN General-Purpose Transistor", Part Number=BC817-25, Pin Count=3, PressFit=No, Sense=No, SMD=Yes, Socket=No
T27: "N-CHANNEL MOSFET WITH DIODE", Case=SOT23-3, Manufacturer="ON SEMICONDUCTOR", Author="CERN DEM JLC", Bonding=No, ComponentHeight=1.11mm, Component Type=Standard, CreateDate=23.03.2009, Device=BSS138LT1G, HelpURL=\\cern.ch\dfs\Applications\Altium\Datasheets\BSS138LT1G.pdf, LatestRevisionDate=23.03.2009, Manufacturer Part Number=BSS138LT1G, Mounted=Yes, PackageDescription="SOT23 3-Leads, Pitch 0.95mm - Body 1.4x3mm, IPC Medium Density", Part Description="50V 200mA N-Channel Enhancement Mode Field-Effect Transistor", Part Number=BSS138LT1G, Pin Count=3, PressFit=No, Sense=No, SMD=Yes, Socket=No
TP1 TP2: library part SMD_PAD_1.27X1.27MM, Author="CERN DEM JLC", ComponentHeight=0mm, Component Type="Standard (No BOM)", CreateDate=12.01.2008, Family="Test Point", HelpURL=Undefined, LatestRevisionDate=12.01.2008, Mounted=No, PackageDescription="1.27mm x 1.27mm PCB Copper Area (SMD Test Point)", Part Description="1.27mm x 1.27mm PCB Copper Area (SMD Test Point)", Part Number=SMD_PAD_1.27X1.27MM, Pin Count=1, Sense=No, SMD=Yes, Socket=No, Status=None

## Via types
v1: diameter 0.5, hole 0.2, Top to Bot, tented both sides, 86 vias
v2: diameter 1.2, hole 0.8, Top to Bot, tented both sides, 2 vias

## Nets (pads, with @x,y where several pads share a name; then routed paths per layer and width w, separated by ;. In a path a pad name is that pad's centre, name@x,y a point inside that pad or via, vN(x,y) a via of type N, cw(c..) or ccw(c..) an arc to the next point about the centre after c; other vN are vias at no path point)
ADC_IN1: C64.1 IC63.23 R78.2 R79.1 | length 44.5
  Top w0.152: v1(14.8,51) 14.8,55.592 v1(14.91,55.702) ; v1(30.531,44.577) 31.99,44.577 v1(32.066,44.501)
  Bot w0.152: v1(14.8,51) 15.613,51 19.195,47.418 19.695,47.418 20.271,46.842 21.936,46.842 22.298,47.204 23.431,47.204 24.091,46.543 24.091,45.927 25.6,44.418 30.372,44.418 v1(30.531,44.577) ; v1(14.91,55.702) 14.987,55.625 15.625,55.625 IC63.23 ; v1(32.066,44.501) 33.567,42.999 33.567,34.643 37.58,30.63 R78.2 37.62,30.65 C64.1 R79.1
ADC_IN2: C63.1 IC63.24 R80.2 R81.1 | length 47.8
  Top w0.152: v1(14.2,51.3) 14.275,51.375 v1(14.275,55.626) ; v1(30.556,45.288) 30.579,45.311 v1(31.928,45.311)
  Bot w0.152: v1(14.2,51.3) 14.267,51.367 14.526,51.367 14.612,51.453 15.555,51.453 19.311,47.697 19.811,47.697 20.387,47.121 21.374,47.121 21.736,47.483 23.546,47.483 24.562,46.467 24.562,46.279 26.143,44.698 29.966,44.698 v1(30.556,45.288) ; v1(14.275,55.626) 14.207,55.626 14.207,55.641 14.722,56.155 15.645,56.155 IC63.24 ; v1(31.928,45.311) 32.032,45.311 33.847,43.496 33.847,37.496 40.106,31.237 40.113,31.237 C63.1 41.38,30.85 R80.2 41.5,29.8 R81.1
DEV_RESETn: IC63.25 R250.1 T27.1 | length 21.9
  Top w0.152: v1(17.4,62) 17.45,62.05 18.85,62.05 v1(18.9,62.1) ; v1(24.341,62.1) 25.27,62.1 v1@25.743,62.573 ; v1(29.159,62.814) 29.159,62.973 29.828,63.641 v1(29.828,63.678)
  Bot w0.152: IC63.25 16.35,57.125 17.45,58.225 17.45,59.017 R250.1@16.856,59.611 ; R250.1 R250.1@16.856,59.611 ; v1(17.4,62) 16.856,61.456 R250.1@16.856,59.611 ; v1(18.9,62.1) v1(24.341,62.1) ; v1@25.743,62.573 25.733,62.563 25.736,62.56 v1(25.756,62.56) 28.905,62.56 v1(29.159,62.814) ; v1(29.828,63.678) 30.579,64.43 T27.1
DI_1: IC63.12
DI_2: IC63.13
DI_3: IC63.14
GND: C2.2 C61.2 C63.2 C64.2 C152.1 C153.2 C155.2 C158.1 C159.1 C160.1 C161.2 C302.1 C303.1 D83.2 D84.3 D85.2 IC51.4 IC53.3 IC63.5 IC63.21 IC63.33 IC64.5 IC70.1 IC70.2 IC70.3 IC70.4 IC70.7 J24.4 J60.4 J63.9 J64.9 J84.6 LD23.1 R61.2 R78.1 R80.1 R171.2 T8.2 T9.2 T27.2 TP2.1 | length 48.5
  Bot w0.254: J64.9 6.461,61.3 v2@6.781,61.619 ; TP2.1 v1(6.364,56.49) ; v1(5.2,48.7) 5.833,48.7 T9.2 ; D85.2 v1(9.5,60.6) ; J84.6 11.02,52.3 11.021,52.299 v1(11.582,52.299) ; C159.1 13.538,58.115 v1(13.64,58.014) ; v1(13.132,66.345) 13.233,66.243 14.3,66.243 ; v1(13.284,54.889) 13.347,54.827 13.347,54.553 13.35,54.55 ; C2.2 13.35,54.55 ; IC70.1 14.254,66.29 14.3,66.243 ; IC70.2 14.904,66.3 14.961,66.243 ; IC70.3 15.554,66.336 15.646,66.243 ; IC70.4 16.204,66.448 15.999,66.243 15.646,66.243 ; v1(18,46.1) 18,45.033 C155.2 ; LD23.1 18.3,32.35 v1(18.3,30.7) ; v1(20.4,67.9) 20.447,67.947 21.197,67.947 D84.3 ; IC64.5 20.598,64.998 20.598,63.702 v1(20.6,63.7) ; v1(22.403,54.178) 22.375,54.15 IC63.5 18.35,54.15 IC63.33 17.85,54.65 IC63.21 15.564,54.564 13.364,54.564 13.35,54.55 ; C302.1 v1(25.019,51.232) ; C303.1 25.201,54.577 v1(25.208,54.585) ; v1(25.095,63.576) 25.136,63.617 C158.1 ; T27.2@32.05,66.15 32.1,66.2 v1(32.1,66.95) 32.066,66.984 D83.2 ; v1(32.6,55.4) 33.5,55.4 C61.2 ; v1(34.3,45.9) 35.212,45.9 C153.2 35.403,45.831 R171.2 ; v1(34.65,48.3) IC51.4 ; IC53.3 34.747,61.392 35.039,61.1 v1(35.398,61.1) v1@35.418,61.08 ; C161.2 v1(36,58.6) ; v1(37.7,32.2) 37.653,32.153 37.653,31.623 R78.1 37.61,31.56 38.49,31.56 C64.2 ; R61.2 v1(40.8,57.8) ; C63.2 40.54,31.71 41.46,31.71 R80.1 41.535,31.635 42.265,31.635 v1(42.3,31.6) ; C152.1 40.986,53.324 40.986,53.986 v1(41,54) ; 14.3,66.243 14.961,66.243 ; 14.961,66.243 15.646,66.243
  Bot w0.762: v2@38.3,61.3 J63.9
  other v2: 38.151,61.29 6.96,61.773
MODBUS_A: D84.1 IC64.6 J63.3 J64.3 JP4.2 | length 61.4
  Top w0.152: J64.3 4.1,63.2 v1(6.6,63.2) ; v1(21.9,66.1) 21.9,67 v1(22.9,68) ; v1(37.9,63.3) J63.3
  Bot w0.152: v1(6.6,63.2) 7.536,63.2 13.119,68.783 D84.1@23.227,68.783 ; v1(21.9,66.1) 21.9,65.035 IC64.6 21.865,64.525 23.329,63.061 24.739,63.061 25.302,62.498 25.302,62.373 25.568,62.107 29.152,62.107 29.883,61.376 29.883,61.001 29.824,60.942 29.824,60.092 30.328,59.588 JP4.2 ; v1(22.9,68) 22.9,68.094 23.171,68.365 23.171,68.726 D84.1@23.227,68.783 ; v1(37.9,63.3) 37.9,63.394 38.012,63.506 38.012,66.219 34.893,69.338 23.938,69.338 D84.1 ; D84.1@23.227,68.783 23.395,68.95 D84.1 ; D84.1@23.227,68.783 23.383,68.783 D84.1
MODBUS_B: D84.2 IC64.7 J63.5 J64.5 R219.1 | length 58.9
  Top w0.152: J64.5 4.1,59.4 v1(6.7,59.4) ; v1(24.4,67.05) 24.475,67.05 25.112,66.413 25.112,66.124 v1(25.527,65.71) ; v1(38.1,59.7) 39.076,59.7 39.476,59.3 J63.5
  Bot w0.152: v1(6.7,59.4) 7.798,60.498 7.798,62.967 13.334,68.503 21.859,68.503 22.286,68.077 22.286,67.973 22.712,67.547 22.828,67.547 23.325,67.05 D84.2 v1(24.4,67.05) 26.409,69.059 34.777,69.059 37.733,66.103 37.733,63.79 37.008,63.065 37.008,61.409 37.291,61.125 37.291,60.509 v1(38.1,59.7) ; IC64.7@23.25,65.115 23.25,65.59 23.638,65.978 24.816,65.978 24.95,65.844 v1@25.662,65.844 ; v1@25.655,65.749 26.035,65.749 26.633,66.347 R219.1
MODBUS_DE: IC63.2 IC64.3 | length 4.8
  Bot w0.152: IC63.2 20.989,55.65 21.188,55.849 21.188,58.435 21.865,59.113 IC64.3
MODBUS_DI: IC63.31 IC64.4 | length 3.3
  Bot w0.254: IC63.31 19.35,57.196 19.943,57.789 19.943,57.918 20.113,58.087 20.113,58.643 20.595,59.125 IC64.4
MODBUS_R_En: IC63.1 IC64.2 | length 9.1
  Bot w0.152: IC63.1 20.55,56.415 20.908,56.773 20.908,58.551 21.098,58.741 21.098,60.459 20.883,60.675 20.883,61.097 21.148,61.362 22.645,61.362 23.135,60.872 IC64.2
MODBUS_RO: IC63.30 R249.1 | length 3.6
  Bot w0.152: IC63.30 18.85,57.458 18.902,57.51 19.176,57.51 19.214,57.548 19.234,57.548 19.613,57.926 19.613,58.054 19.619,58.06 19.619,58.97 19.253,59.335 R249.1
NetC2_1: C2.1 IC63.20 | length 1.5
  Bot w0.152: C2.1 14.4,54.15 IC63.20
NetC61_1: C61.1 IC51.5 R76.1 | length 3.5
  Bot w0.254: R76.1 33.97,53.13 C61.1 33.8,53.7 IC51.5
NetC62_1: C62.1 D2.2 IC51.7 R60.2 | length 4.3
  Bot w0.254: C62.1 37.147,56.397 38.257,56.397 D2.2@38.277,56.417 ; IC51.7 38.132,53.797 38.132,55.102 R60.2 38.277,55.247 D2.2@38.277,56.417 ; D2.2 D2.2@38.277,56.417
NetC62_2: C62.2 IC51.6 R65.1 R77.2 | length 6.8
  Bot w0.254: IC51.6 36.882,53.817 36.882,55.233 C62.2 36.96,55.39 36.04,55.39 R77.2 35.98,55.43 35.436,55.974 35.436,56.765 36.471,57.8 R65.1
NetC152_2: C152.2 D43.1 D44.1 IC51.8 R60.1 R170.1 | length 8.5
  Bot w0.254: R60.1 39.237,55.132 39.237,53.767 IC51.8 ; IC51.8@39.278,53.561 39.278,53.252 40.119,52.411 40.79,52.411 40.873,52.328 40.873,52.311 40.923,52.261 40.923,51.381 R170.1 42.053,51.331 42.473,50.911 D43.1 42.473,50.531 42.97,50.034 42.97,49.404 D44.1
NetC153_1: C153.1 IC51.3 R173.1 | length 6.6
  Bot w0.152: R173.1 33.943,50.641 34.157,50.427 35.113,50.427 36.738,48.802 IC51.3@36.738,48.161
  Bot w0.254: IC51.3@36.738,48.161 36.765,48.133 36.765,46.268 C153.1
NetC154_1: C154.1 D45.2 IC51.1 R170.2 | length 6.5
  Bot w0.254: C154.1 39.264,46.602 39.264,48.147 39.278,48.161 41.039,48.161 ; R170.2 40.876,50.391 41.039,50.228 41.039,48.161 ; D45.2 41.07,47.504 41.07,48.13 41.039,48.161
NetC154_2: C154.2 IC51.2 R172.1 R176.2 | length 3.9
  Bot w0.254: IC51.2@38.008,48.161 38.179,47.989 38.179,46.704 C154.2 38.313,46.551 38.313,45.631 38.243,45.561 38.273,45.531 38.273,44.491 R172.1
NetC302_2: C302.2 IC63.8 Q9.1 | length 11.5
  Bot w0.152: IC63.8 24.384,52.65 ; C302.2 24.373,52.639 24.384,52.65 ; Q9.1 27.508,52.095 26.954,52.65 24.384,52.65
NetC303_2: C303.2 IC63.7 Q9.2 | length 11.4
  Bot w0.152: IC63.7 24.359,53.15 ; C303.2 24.373,53.164 24.359,53.15 ; Q9.2 27.508,54.331 26.328,53.15 24.359,53.15
NetD2_1: D2.1 J24.2 R77.1 | length 27.6
  Top w0.254: v1(38.3,42.9) 43.333,42.9 43.433,42.8 v1(43.5,42.8)
  Bot w0.254: R77.1 36.02,56.37 36.634,56.984 39.966,56.984 40.45,56.5 D2.1 40.83,56.5 41.989,55.341 41.989,52.214 43.557,50.646 43.557,42.923 43.5,42.867 v1(43.5,42.8) ; v1(38.3,42.9) 38.347,42.853 38.347,40.783 J24.2
NetD44_2: D44.2 J24.1 | length 14.2
  Bot w0.254: J24.1 37.044,39.546 41.448,39.546 42.209,40.307 42.209,45.967 43.073,46.831 D44.2
NetD45_1: D45.1 J24.3 R176.1 | length 7.8
  Bot w0.254: J24.3 39.243,42.427 R176.1 39.39,45.414 41.07,45.414 41.173,45.311 D45.1
NetD46_1: D46.1 D48.3 | length 1.6
  Bot w0.152: D48.3 14.192,47.244 D46.1
NetD46_2: D46.2 RL5.1 T8.3 | length 9.8
  Bot w0.152: D46.2 18.517,47.244 19.406,46.355 T8.3@22.682,46.355 ; RL5.1@23.673,42.711 RL5.1 23.7,42.661 22.682,43.678 T8.3@22.682,46.355 ; T8.3@22.682,46.355 22.828,46.355 T8.3 T8.3@22.682,46.355
NetD47_1: D47.1 D49.3 | length 2.2
  Bot w0.254: D47.1 7.468,49.022 7.79,48.7 D49.3
NetD47_2: D47.2 RL3.1 T9.3 | length 6.9
  Bot w0.152: RL3.1 4.823,46.161 T9.3 4.973,46.511 5.769,47.307 7.379,47.307 D47.2@7.533,47.461
NetD83_1: D83.1 R257.2 T27.3 | length 4.7
  Bot w0.152: T27.3@34.234,65.316 34.366,65.184 35.686,65.184 R257.2
  Bot w0.254: D83.1 33.466,67.161 34.297,66.33 T27.3
NetIC63_32: IC63.32 R4.1 | length 40.2
  Top w0.152: v1(20.447,57.709) 22.377,57.709 v1(22.428,57.658) ; v1(26.924,54.46) 28.108,54.46 v1(28.118,54.45)
  Bot w0.152: R4.1 18.47,38.87 18.684,39.084 18.684,40.904 19.953,42.173 19.953,43.194 20.412,43.653 21.142,43.653 21.692,43.104 21.692,42.313 22.603,41.402 26.924,41.402 29.429,43.907 30.502,43.907 31.009,44.415 31.009,45.636 30.992,45.654 30.992,46.986 29.261,48.718 29.261,52.083 28.118,53.226 v1(28.118,54.45) ; IC63.32 19.85,57.125 20.434,57.709 v1(20.447,57.709) ; v1(22.428,57.658) 22.513,57.658 24.57,55.601 25.248,55.601 26.388,54.46 v1(26.924,54.46)
NetIC64_1: IC64.1 R249.2 | length 7.3
  Bot w0.254: R249.2 19.253,60.999 19.947,61.693 23.572,61.693 24.405,60.86 IC64.1
NetJ58_1: J58.1 RL5.2 | length 23.9
  Bot w1.27: RL5.2 23.723,27.463 20.371,24.111 20.371,10.913 J58.1
NetJ58_2: J58.2 RL5.3 | length 17.5
  Bot w1.27: RL5.3 27.923,18.461 J58.2
NetJ58_3: J58.3 RL5.4 | length 14
  Top w1.27: RL5.4 23.723,14.561 J58.3
NetJ58_4: J58.4 RL5.7 | length 25.4
  Top w1.27: RL5.7 31.223,27.463 27.534,23.774 27.534,16.078 34.923,8.689 J58.4
NetJ58_5: J58.5 RL5.6 | length 18.8
  Bot w1.27: RL5.6 38.423,15.461 J58.5
NetJ58_6: J58.6 RL5.5 | length 15.2
  Top w1.27: RL5.5 31.223,17.611 41.923,6.911 J58.6
NetJ59_1: J59.1 RL3.2 | length 21.7
  Bot w1.27: J59.1 2.323,25.161 RL3.2
NetJ59_2: J59.2 RL3.3 | length 17.4
  Bot w1.27: RL3.3 7.417,20.067 7.417,8.698 5.823,7.104 J59.2
NetJ59_3: J59.3 RL3.4 | length 12.6
  Top w1.27: RL3.4 5.613,16.87 5.613,10.67 J59.3
NetJ59_4: J59.4 RL3.7 | length 23.8
  Top w1.27: RL3.7 12.323,27.463 8.89,24.03 8.89,14.783 12.823,10.85 J59.4
NetJ59_5: J59.5 RL3.6 | length 17.4
  Bot w1.27: RL3.6 16.323,18.661 J59.5
NetJ59_6: J59.6 RL3.5 | length 13.8
  Top w1.27: RL3.5 19.823,10.161 J59.6
NetJ60_2: J60.2 R79.2 | length 3.3
  Bot w0.152: J60.2 38.43,27.83 R79.2
NetJ60_3: J60.3 R81.2 | length 3.4
  Bot w0.152: J60.3 40.97,27.67 R81.2
NetJ63_4: J63.4 J64.4 | length 47.8
  Top w0.152: J64.4 4.391,60.909 8.001,60.909 8.392,61.3 v1(8.629,61.3) ; v1(35.886,62.3) 38.5,62.3 39.5,61.3 J63.4
  Bot w0.152: v1(8.629,61.3) 8.433,61.497 8.433,62.746 11.299,65.612 16.386,65.612 17.327,66.553 22.088,66.553 22.374,66.267 25.267,66.267 27.5,68.5 34.313,68.5 36.413,66.399 36.413,63.656 36.294,63.537 36.22,63.537 36.17,63.486 36.17,62.583 v1(35.886,62.3)
NetJ63_6: J63.6 J64.6 | length 39.2
  Bot w0.152: J64.6 5.5,67.3 8.097,69.897 36.903,69.897 39.5,67.3 J63.6
NetJ63_7: J63.7 R257.1 | length 7.3
  Top w0.152: v1(35.2,64) 35.21,64 35.61,64.4 v1(38.8,64.4)
  Bot w0.152: v1(35.2,64) 35.87,64 R257.1 ; v1(38.8,64.4) 38.7,64.5 38.806,64.5 38.866,64.56 38.866,64.666 39.2,65 39.5,65.3 J63.7
NetJ63_8: J63.8 J64.8 | length 43.4
  Bot w0.152: J64.8 5.571,63.3 5.924,63.653 6.788,63.653 6.794,63.647 7.588,63.647 13.558,69.617 35.009,69.617 38.291,66.335 38.291,64.267 38.835,63.724 39.076,63.724 39.5,63.3 J63.8
NetJ63_10: J63.10 J64.10 | length 51.3
  Bot w0.152: J64.10 4.353,58.947 6.888,58.947 8.077,60.136 8.077,62.785 11.184,65.892 16.27,65.892 17.211,66.833 22.203,66.833 22.489,66.547 25.152,66.547 27.384,68.779 34.662,68.779 37.453,65.988 37.453,63.986 37.167,63.7 37.167,63.62 36.728,63.181 36.728,61.293 37.012,61.009 37.012,60.393 37.436,59.968 37.436,59.723 37.912,59.247 40.947,59.247 J63.10
NetJP4_1: JP4.1 R219.2 | length 5
  Bot w0.152: R219.2 29.167,63.447 29.709,62.905 29.709,62.35 30.012,62.047 30.388,62.047 30.691,62.35 30.97,62.35 JP4.1 ; JP4.1@31.727,62.35 JP4.1@31.847,62.23
NetLD23_2: LD23.2 R4.2 | length 2
  Bot w0.254: LD23.2 18.45,36.2 R4.2
NetR61_1: R61.1 R65.2 | length 0.9
  Bot w0.254: R65.2 R61.1
NetR171_1: R171.1 R172.2 | length 1
  Bot w0.254: R171.1 R172.2
NetR174_2: R174.2 T8.1 | length 1.5
  Bot w0.152: T8.1 21.732,49.558 R174.2
NetR175_2: R175.2 T9.1 | length 1.5
  Bot w0.152: T9.1 4.023,49.981 R175.2
P3V3: C159.2 C160.2 IC53.2 IC63.4 IC63.18 IC70.8 J84.2 R218.1 R250.2 R309.1 R311.1 TP1.1 | length 66.6
  Top w0.381: v1(8.4,53.9) 9.1,54.6 v1(10.3,54.6) ; v1(18,65.8) v1(19.2,65.8) ; v1(25.3,60.5) 25.608,60.5 v1(26.441,61.333) ; v1(29.43,61.189) 29.82,61.189 v1(30.277,60.731)
  Bot w0.254: R218.1 11.83,59.57 12.2,59.2
  Bot w0.381: TP1.1@5.182,53.99 8.31,53.99 v1(8.4,53.9) 8.415,53.885 8.415,52.265 J84.2 ; v1(10.3,54.6) 11.8,54.6 11.925,54.725 ; IC70.8 13.621,61.667 13.6,61.646 ; IC63.18 15.646,53.146 14.873,53.146 14.698,52.972 13.49,52.972 13.24,52.722 12.77,52.722 12.226,53.265 12.226,53.813 12.09,53.949 12.09,53.96 11.98,54.07 11.98,54.67 11.925,54.725 ; R250.2 R309.1 13.988,58.712 13.5,59.2 ; v1(18,65.8) 17.046,64.846 14.351,64.846 13.6,64.095 13.6,61.646 ; v1(19.2,65.8) 19.2,64.297 20.83,62.667 24.576,62.667 24.908,62.335 24.908,62.21 25.785,61.333 v1(26.441,61.333) 26.586,61.189 v1(29.43,61.189) ; IC63.4 21.258,54.65 22.034,55.427 22.034,57.249 21.861,57.423 21.861,57.893 22.193,58.225 24.675,58.225 24.8,58.1 25.3,58.6 v1(25.3,60.5) ; v1(30.277,60.731) 30.769,60.731 30.998,60.96 32.749,60.96 IC53.2 ; 11.925,54.725 11.925,57.943 C159.2 12.098,59.098 12.2,59.2 13.5,59.2 ; 13.5,59.2 13.515,59.2 13.6,59.285 13.6,61.646
P5V0: C155.1 C158.2 C161.1 D48.1 D49.1 IC53.1 IC64.8 J60.1 J63.1 J64.1 RL3.8 RL5.8 | length 131.9
  Top w0.254: v1(19.5,43.2) v1(20.6,43.2)
  Top w0.508: 28.8,71.088 28.8,67.9 v1(29.1,67.6)
  Top w1.27: J64.1 5.23,67.3 9.018,71.088 28.8,71.088 34.188,71.088 37.841,67.435 40.865,67.435 J63.1
  Bot w0.254: D49.1 13.136,49.65 D48.1 13.172,48.294 12.402,47.523 12.402,43.467 12.731,43.138 12.8,43.138 12.8,43.092 13.129,42.763 17.675,42.763 C155.1 18.112,43.2 v1(19.5,43.2) ; v1(20.6,43.2) 21.361,42.439 21.361,42.176 22.466,41.072 29.634,41.072 RL5.8@30.931,42.369 ; IC64.8 24.405,64.525 C158.2@25.756,64.525 ; C158.2 28.322,64.517 29.1,65.295 29.1,65.735 ; v1(29.1,67.6) 29.1,65.735 ; J60.1 35.89,31.27 31.223,35.937 31.223,42.077 RL5.8@30.931,42.369 ; 29.1,65.735 29.132,65.767 31.351,65.767 31.367,65.751 32.09,65.751 32.776,65.065 32.776,63.367 32.709,63.3 33.392,62.617 33.392,61.985 34.798,60.579 34.798,60.026 34.912,59.912 IC53.1 35.697,59.758 35.103,59.164 34.935,59.164 34.45,58.679 C161.1 34.45,57.137 33.392,56.079 32.566,56.079 30.759,54.272 30.759,47.883 31.322,47.32 31.322,45.791 31.389,45.723 31.389,42.827 RL5.8 RL5.8@30.931,42.369
  other v1: 28.55,67.589
P12V0: D43.2 J63.2 J64.2 | length 54.9
  Top w1.27: J64.2@5.365,65.3 6.048,65.3 9.76,69.012 24.019,69.012 26.585,66.446 30.066,66.446 31.582,67.962 35.338,67.962 37.839,65.461 J63.2@39.073,65.461